# Altium PCB theremania_test_board2.PcbDoc
Units mm, origin at the board's own origin, x right, y up, seen from the top; angles counter-clockwise.
Board outline 88.9 x 67.06 mm, 2 copper layers (Top Layer, Bottom Layer); 64 components, 47 nets, 221 pads, 16 vias.
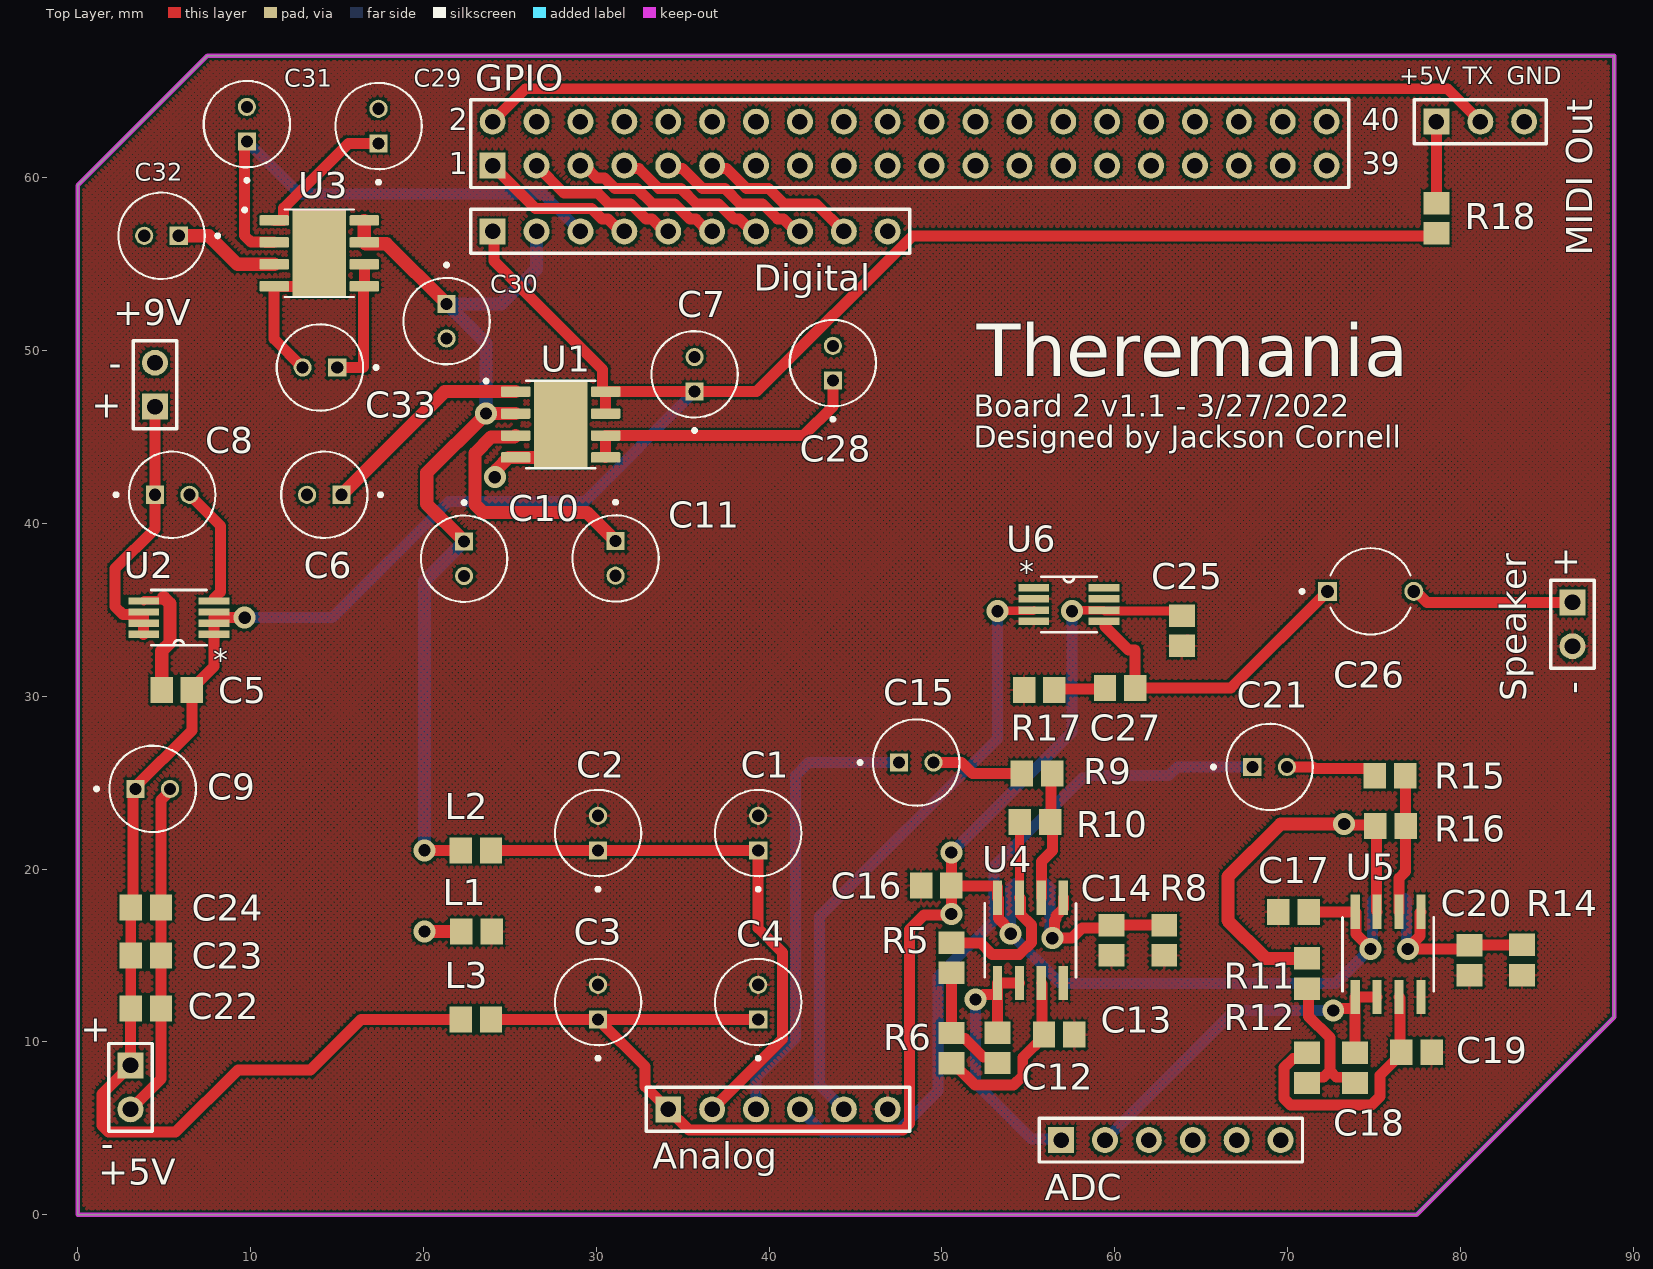
[diagram p0: Top Layer view]
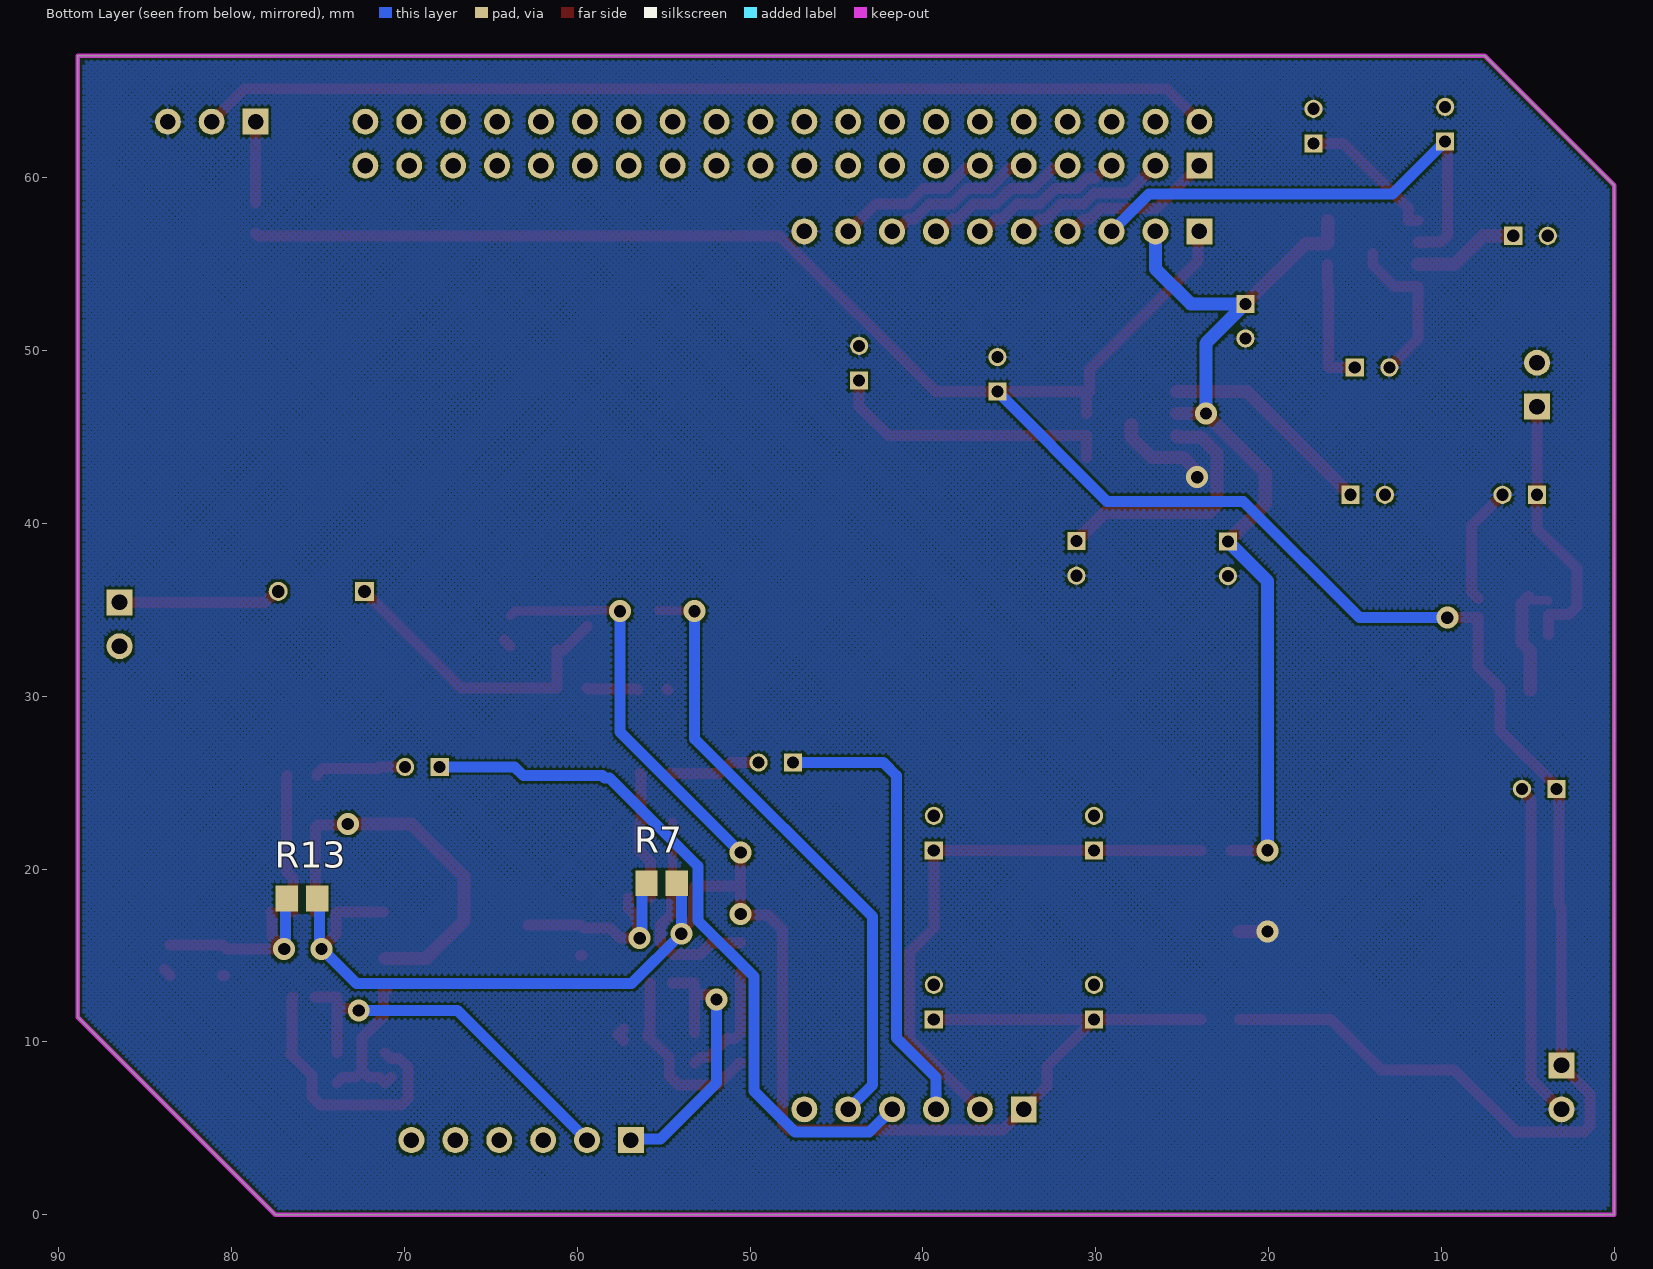
[diagram p1: Bottom Layer view, seen from below]

## Layer stack, top to bottom
Top Solder: solder mask 0.0102, Solder Resist, Dk 3.5
Top Layer: signal copper 0.0356
Dielectric 1: dielectric 0.32, FR-4, Dk 4.8
Bottom Layer: signal copper 0.0356
Bottom Solder: solder mask 0.0102, Solder Resist, Dk 3.5

## Board outline
0,0 0,59.563 7.493,67.056 88.9,67.056 88.9,11.43 77.47,0

## Design rules (kind name [scope] priority, off if disabled: settings)
BoardOutlineClearance [All] p1: gap=0.2 ignorepadtopadclearanceinfootprint=FALSE
Clearance [All] p1: gap=0.127 ignorepadtopadclearanceinfootprint=FALSE except(0.25: Arc-Hole Track-Hole SMDPad-Hole THPad-Hole Via-Hole Fill-Hole Poly-Hole Region-Hole)
ComponentClearance [All] p1: gap=0.127 collisioncheckmode=3 verticalgap=0.127 showdistances=TRUE
DiffPairsRouting [All] p1: maxlimit=0.254 minlimit=0.127 mostfreqgap=0.127 toplayer_minwidth=0.127 toplayer_maxwidth=25.4 toplayer_prefwidth=0.127 bottomlayer_minwidth=0.127 bottomlayer_maxwidth=25.4 bottomlayer_prefwidth=0.127 maxuncoupledlength=0.127
Height [All] p1: minheight=0 maxheight=1816.048 prefheight=1816.048
HoleSize [All] p1: absolutevalues=TRUE maxlimit=6.3 minlimit=0.3 maxpercent=80.000 minpercent=20.000
HoleToHoleClearance [All] p1: gap=0.25 allowstackedmicrovias=TRUE
LayerPairs [All] p1: enforce=FALSE
MinimumSolderMaskSliver [All] p1: minsoldermaskwidth=0
PlaneConnect PlaneConnectPowerPads [InPadClass('PowerPads')] p1: planeconnectstyle=Direct reliefexpansion=0.508 reliefentries=4 reliefconductorwidth=0.254 reliefairgap=0.254
PlaneConnect [All] p2: pad.planeconnectstyle=Relief pad.reliefexpansion=0.3 pad.reliefentries=4 pad.reliefconductorwidth=0.127 pad.reliefairgap=0.127 via.planeconnectstyle=Direct via.reliefexpansion=0.3 via.reliefentries=4 via.reliefconductorwidth=0.127 via.reliefairgap=0.254
PolygonConnect PolygonConnectPowerPads [All vs (InPadClass('PowerPads'))] p1: connectstyle=Direct reliefconductorwidth=0.254 reliefentries=4 polygonreliefangle="90 Angle" airgapwidth=0.254
PolygonConnect [All] p2: thpad.connectstyle=Relief thpad.reliefconductorwidth=0.127 thpad.reliefentries=4 thpad.polygonreliefangle="90 Angle" thpad.airgapwidth=0.127 smdpad.connectstyle=Relief smdpad.reliefconductorwidth=0.127 smdpad.reliefentries=4 smdpad.polygonreliefangle="90 Angle" smdpad.airgapwidth=0.127 via.connectstyle=Direct via.reliefconductorwidth=0.127 via.reliefentries=4 via.polygonreliefangle="90 Angle" via.airgapwidth=0.254
RoutingVias [All] p1: holewidth=0.3 width=0.6 viastyle="Through Hole" minholewidth=0.3 minwidth=0.6 maxholewidth=0.6 maxwidth=1.27
SilkToSilkClearance [All] p1: silktosilkclearance=0
SilkToSolderMaskClearance [IsPad] p1 off: minsilkscreentomaskgap=0.254 clearancetoexposedcopper=TRUE
SolderMaskExpansion [All] p1: expansion=0.102
Width [All] p1: maxlimit=25.4 minlimit=0.127 preferedwidth=0.127 minimp=50.000000 maximp=50.000000 favimp=50.000000
20 further rules are at their usual default settings.

## Classes and differential pairs
component class speaker: C25 C26 C27 R17 Speaker U6
component class preamp: C12 C13 C14 C15 C16 C17 C18 C19 C20 C21 R5 R6 R7 R8 R9 R10 R11 R12 R13 R14 R15 R16 U4 U5
component class power: +9V C1 C2 C3 C4 C5 C6 C7 C8 C9 C10 C11 C28 C29 C30 C31 C32 C33 L1 L2 L3 U1 U2 U3
component class midi: "MIDI Out" R18
component class fpga: +5V ADC C22 C23 C24 GPIO
component class connectors: Analog Digital

## Components (designator, comment, footprint, x,y, rotation, side; value= is the part's Value field where it differs from the comment)
+5V "Header 2" HDR1X2 3.048,8.636 r270 top
+9V "Header 2" HDR1X2 4.465,46.756 r90 top
ADC "Header 6" HDR1X6 56.896,4.318 r0 top
Analog "Header 6" HDR1X6 34.163,6.096 r0 top
C1 "10uF" CAPPRD200W50D500H1250 39.37,22.082 r90 top
C2 "10uF" CAPPRD200W50D500H1250 30.099,22.082 r90 top
C3 "10uF" CAPPRD200W50D500H1250 30.099,12.303 r90 top
C4 "10uF" CAPPRD200W50D500H1250 39.37,12.303 r90 top
C5 "Cap" CAPC0805 5.729,30.353 r0 top value=100pF
C6 "10uF" CAPPRD200W50D500H1250 14.264,41.656 r180 top
C7 "10uF" CAPPRD200W50D500H1250 35.687,48.625 r90 top
C8 "1uF" CAPPRD200W50D500H1250 5.461,41.656 r0 top
C9 "1uF" CAPPRD200W50D500H1250 4.334,24.638 r0 top
C10 "10uF" CAPPRD200W50D500H1250 22.352,37.957 r270 top
C11 "1uF" CAPPRD200W50D500H1250 31.115,37.973 r270 top
C12 "Cap" CAPC0805 53.213,9.652 r90 top value=33nF
C13 "Cap" CAPC0805 56.783,10.414 r180 top value=3.3nF
C14 "Cap" CAPC0805 59.817,15.875 r90 top value=0.1uF
C15 "10uF" CAPPRD200W50D500H1250 48.514,26.162 r0 top
C16 "Cap" CAPC0805 49.671,19.05 r0 top value=0.1uF
C17 "Cap" CAPC0805 70.344,17.526 r0 top value=0.1uF
C18 "Cap" CAPC0805 73.914,8.495 r90 top value=33nF
C19 "Cap" CAPC0805 77.456,9.398 r180 top value=3.3nF
C20 "Cap" CAPC0805 80.518,14.718 r90 top value=0.1uF
C21 "10uF" CAPPRD200W50D500H1250 68.961,25.908 r0 top
C22 "Cap" CAPC0805 3.937,11.938 r180 top value=0.1uF
C23 "Cap" CAPC0805 3.937,14.986 r180 top value=0.1uF
C24 "Cap" CAPC0805 3.937,17.78 r180 top value=0.1uF
C25 "Cap" CAPC0805 63.881,33.782 r90 top value=0.1uF
C26 "270uF" CAPPRD500W50D500H1100 74.803,36.068 r0 top
C27 "Cap" CAPC0805 60.311,30.48 r180 top value=0.047uF
C28 "1uF" CAPPRD200W50D500H1250 43.688,49.276 r90 top
C29 "10uF" CAPPRD200W50D500H1250 17.399,62.992 r90 top
C30 "10uF" CAPPRD200W50D500H1250 21.336,51.705 r270 top
C31 "10uF" CAPPRD200W50D500H1250 9.779,63.103 r90 top
C32 "1uF" CAPPRD200W50D500H1250 4.842,56.642 r180 top
C33 "1uF" CAPPRD200W50D500H1250 14.01,49.022 r180 top
Digital "Header 10" HDR1X10 24.003,56.896 r0 top
GPIO "Header 20X2" HDR2X20 24.003,60.706 r0 top
L1 "FB" RES0805 23.067,16.383 r180 top
L2 "FB" RES0805 23.034,21.082 r0 top
L3 "FB" RES0805 23.034,11.303 r0 top
"MIDI Out" "Header 3" HDR1X3 78.613,63.246 r0 top
R5 "Res3" RES0805 50.546,14.873 r270 top value=1K
R6 "Res3" RES0805 50.546,9.638 r270 top value=39K
R7 "Res3" RES0805 55.118,19.177 r0 bottom value=1K
R8 "Res3" RES0805 62.865,15.875 r90 top value=1K
R9 "Res3" RES0805 55.499,25.527 r0 top value=10K
R10 "Res3" RES0805 55.386,22.733 r180 top value=10K
R11 "Res3" RES0805 71.12,13.956 r270 top value=1K
R12 "Res3" RES0805 71.12,8.495 r90 top value=39K
R13 "Res3" RES0805 75.932,18.288 r0 bottom value=1K
R14 "Res3" RES0805 83.566,14.732 r90 top value=1K
R15 "Res3" RES0805 75.932,25.4 r0 top value=10K
R16 "Res3" RES0805 75.96,22.479 r180 top value=10K
R17 "Res" RES0805 55.626,30.353 r180 top value=10
R18 "Res" RES0805 78.613,57.658 r90 top value=220
Speaker "Header 2" HDR1X2 86.487,35.433 r270 top
U1 "LDO" SOIC127P600X175-9N 27.94,45.72 r0 top
U2 "ADP3335ARMZ-5" SOP65P490X110-8N 5.842,34.544 r180 top
U3 "LDO" SOIC127P600X175-9N 13.97,55.626 r0 top
U4 "LT1632CS8PBF" SO-8_S 55.118,15.875 r90 top
U5 "LT1632CS8PBF" SO-8_S 75.819,15.062 r90 top
U6 "LM386M-1/NOPB" SOP65P490X110-8N 57.347,35.306 r0 top

## Footprints (in the part's own frame and the unit in brackets; to place one, negate y for a bottom-side part, rotate by r counter-clockwise, add the part's x,y. Pads: shape width x height; smd on the part's side, far side on the other; paste and mask are expansions set on the pad)
CAPC0805 [mm] "Chip Capacitor, 2-Leads, Body 2.01x1.25mm, IPC Medium Density"
  rect 1.3x1.5 smd: 1(-0.875,0) 2(0.875,0)
  body extent -1.1,-0.72 1.11,0.72, height 1.8
CAPPRD200W50D500H1250 [mm]
  round 1.05 hole 0.7: N(1,0)
  rect 1.05x1.05 hole 0.7: P(-1,0)
  silkscreen extent -3.35,-2.5 2.5,2.5
CAPPRD500W50D500H1100 [mm]
  round 1.1 hole 0.75: N(2.5,0)
  rect 1.1x1.1 hole 0.75: P(-2.5,0)
  silkscreen extent -4.06,-2.5 2.32,2.5, body extent -2.75,-2.5 2.75,2.5, height 11
HDR1X2 [mm] "Connector; Header; 2 Position"
  rect 1.5x1.5 hole 0.9: 1(0,0)
  round 1.5 hole 0.9: 2(2.54,0)
  silkscreen extent -1.27,-1.27 3.81,1.27
HDR1X3 [mm] "Connector; Header; 3 Position"
  rect 1.5x1.5 hole 0.9: 1(0,0)
  round 1.5 hole 0.9: 2(2.54,0) 3(5.08,0)
  silkscreen extent -1.27,-1.27 6.35,1.27
HDR1X6 [mm] "Connector; Header; 6 Position"
  rect 1.5x1.5 hole 0.9: 1(0,0)
  round 1.5 hole 0.9: 2(2.54,0) 3(5.08,0) 4(7.62,0) 5(10.16,0) 6(12.7,0)
  silkscreen extent -1.27,-1.27 13.97,1.27
HDR1X10 [mm] "Connector; Header; 10 Position"
  rect 1.5x1.5 hole 0.9: 1(0,0)
  round 1.5 hole 0.9: 2(2.54,0) 3(5.08,0) 4(7.62,0) 5(10.16,0) 6(12.7,0) 7(15.24,0) 8(17.78,0) 9(20.32,0) 10(22.86,0)
  silkscreen extent -1.27,-1.27 24.13,1.27
HDR2X20 [mm] "Connector; Header; 20x2 Position"
  rect 1.5x1.5 hole 0.9: 1(0,0)
  round 1.5 hole 0.9: 2(0,2.54) 3(2.54,0) 4(2.54,2.54) 5(5.08,0) 6(5.08,2.54) 7(7.62,0) 8(7.62,2.54) 9(10.16,0) 10(10.16,2.54) 11(12.7,0) 12(12.7,2.54) 13(15.24,0) 14(15.24,2.54) 15(17.78,0) 16(17.78,2.54) 17(20.32,0) 18(20.32,2.54) 19(22.86,0) 20(22.86,2.54) 21(25.4,0) 22(25.4,2.54) 23(27.94,0) 24(27.94,2.54) 25(30.48,0) 26(30.48,2.54) 27(33.02,0) 28(33.02,2.54) 29(35.56,0) 30(35.56,2.54) 31(38.1,0) 32(38.1,2.54) 33(40.64,0) 34(40.64,2.54) 35(43.18,0) 36(43.18,2.54) 37(45.72,0) 38(45.72,2.54) 39(48.26,0) 40(48.26,2.54)
  silkscreen extent -1.27,-1.27 49.53,3.81
RES0805 [mm] "Chip Resistor, 2-Leads, Body 2.01x1.25mm, IPC Medium Density"
  rect 1.3x1.5 smd: 1(-0.875,0) 2(0.875,0)
  body extent -1.1,-0.72 1.11,0.72, height 1.8
SO-8_S [mil]
  rect 78x21 smd: 1(-97,75) 2(-97,25) 3(-97,-25) 4(-97,-75) 5(97,-75) 6(97,-25) 7(97,25) 8(97,75)
  silkscreen extent -84,-104 84,104
SOIC127P600X175-9N [mm]
  rrect25% 1.71x0.61 smd: 1(-2.605,1.905) 2(-2.605,0.635) 3(-2.605,-0.635) 4(-2.605,-1.905) 5(2.605,-1.905) 6(2.605,-0.635) 7(2.605,0.635) 8(2.605,1.905)
  rect 3.1x5 smd paste-3: 9(0,0)
  silkscreen extent -4.41,-2.53 2,2.61
SOP65P490X110-8N [mil]
  rect 70x17 smd: 1(-80,38) 2(-80,13) 3(-80,-13) 4(-80,-38) 5(80,-38) 6(80,-13) 7(80,13) 8(80,38)
  silkscreen extent -63,-63 63,63

## Part data
+5V +9V Speaker: "Header, 2-Pin", LatestRevisionDate=17-Jul-2002, LatestRevisionNote="Re-released for DXP Platform.", Publisher="Altium Limited"
ADC Analog: "Header, 6-Pin", LatestRevisionDate=17-Jul-2002, LatestRevisionNote="Re-released for DXP Platform.", Publisher="Altium Limited"
C1 C2 C3 C4 C6 C7 C8 C9 C10 C11 C15 C21 C26 C28 C29 C30 C31 C32 C33: library part EEUFS0J221B, "Aluminum Electrolytic Capacitors, 220uF, 6.3V, -40 to 105C", Package="RADIAL-2 Panasonic", Availability="In Stock", Check_prices=https://www.snapeda.com/parts/EEUFS0J221B/Panasonic/view-part/5796863/?ref=eda, MF=Panasonic, MP=EEUFS0J221B, Price=None, Purchase-URL=https://pricing.snapeda.com/search/part/EEUFS0J221B/?ref=eda, SnapEDA_Link=https://www.snapeda.com/parts/EEUFS0J221B/Panasonic/view-part/5796863/?ref=snap
C5 C25 C27: Supplier Part Number 1=1276-1000-1-ND, Supplier 1=Digi-Key
C12 C13 C14 C16 C17 C18 C19 C20 C22 C23 C24: "Capacitor", LatestRevisionDate=17-Jul-2002, LatestRevisionNote="Re-released for DXP Platform.", PackageDescription="Radial Cap, Thru-Hole; 2 Leads; 0.3 in Pin Spacing", PackageReference=RAD-0.3, Published=8-Jun-2000, Publisher="Altium Limited"
Digital: "Header, 10-Pin", LatestRevisionDate=17-Jul-2002, LatestRevisionNote="Re-released for DXP Platform.", Publisher="Altium Limited"
GPIO: "Header, 20-Pin, Dual row", LatestRevisionDate=17-Jul-2002, LatestRevisionNote="Re-released for DXP Platform.", Publisher="Altium Limited"
L1 L2 L3: library part Inductor, "Inductor", Code_IEC=1005, Code_JEITA=0402, LatestRevisionDate=29-May-2009, LatestRevisionNote="IPC-7351 Footprint Added.", PackageDescription="Chip Inductor", PackageReference=0402-A, Published=8-Jun-2000, Publisher="Altium Limited"
"MIDI Out": "Header, 3-Pin", LatestRevisionDate=17-Jul-2002, LatestRevisionNote="Re-released for DXP Platform.", Publisher="Altium Limited"
R5 R6 R7 R8 R9 R10 R11 R12 R13 R14 R15 R16: "Resistor", LatestRevisionDate=29-May-2009, LatestRevisionNote="IPC-7351 Footprint Added.", PackageDescription="Chip Resistor", PackageReference=J1-0603, Published=8-Jun-2000, Publisher="Altium Limited"
R17 R18: Supplier Part Number 1=RMCF0603JT10K0CT-ND, Supplier 1=Digi-Key
U1 U3: library part ADM7154
U2: library part ADP3335ARMZ-3.3, "Linear Voltage Regulator IC 1 Output 500mA 8-MSOP", Package="MSOP-8 Analog Devices", Availability=Unavailable, MF="Analog Devices", MP=ADP3335ARMZ-3.3, Price=None, SnapEDA_Link=https://www.snapeda.com/parts/ADP3335ARMZ-3.3/Analog%20Devices/view-part/674568/?ref=snap
U4 U5: "45MHz, 45V/ms, Dual/Quad Rail-to-Rail Input and Output  Precision Op Amps", Package=None, Availability=Unavailable, MP=LT1632CS8PBF, Price=None
U6: "Wide Input Voltage Low Power Audio Amplifier with Internal Gain", Package="SOIC-8 Texas Instruments", Availability=Unavailable, MF="Texas Instruments", MP=LM386M-1, Price=None, SnapEDA_Link=https://www.snapeda.com/parts/LM386M-1/Texas%20Instruments/view-part/2583261/?ref=snap

## Via types
v1: diameter 1.27, hole 0.711, Top Layer to Bottom Layer, 16 vias

## Nets (pads, with @x,y where several pads share a name; then routed paths per layer and width w, separated by ;. In a path a pad name is that pad's centre, name@x,y a point inside that pad or via, vN(x,y) a via of type N, cw(c..) or ccw(c..) an arc to the next point about the centre after c; other vN are vias at no path point)
1.2VD: C31.P Digital.3 U3.2 | length 29.4
  Top Layer w0.635: C31.P 9.652,61.976 9.652,56.645 10.024,56.273 11.353,56.273 U3.2 U3.2@10.84,56.261
  Bottom Layer w0.635: C31.P 12.827,59.055 26.924,59.055 Digital.3
3.3VA: Analog.2 C1.P C2.P L2.2 | length 32.9
  Top Layer w0.635: L2.2 C2.P C1.P 39.37,16.573 40.767,15.176 40.767,10.16 Analog.2
  Bottom Layer w0.635: Analog.2@36.576,6.223 Analog.2
3.3VD: C10.P C30.P Digital.2 L2.1 U1.2 U3.7 U3.8 | length 55.3
  Top Layer w0.635: v1(20.066,21.082) L2.1
  Top Layer w0.762: U3.8 U3.7 16.651,56.185 17.856,56.185 C30.P ; C10.P 20.193,41.116 20.193,42.926 v1(23.622,46.355) U1.2
  Bottom Layer w0.762: v1(20.066,21.082) 20.066,36.671 C10.P ; v1(23.622,46.355) 23.622,50.419 C30.P 24.511,52.705 26.543,54.737 Digital.2
5VA: Analog.1 C3.P C4.P C16.2 C17.2 C25.2 L3.2 R7.1 R13.1 U4.8 U5.8 U6.6 | length 118.6
  Top Layer w0.508: v1(57.531,34.925) 57.582,34.976 U6.6 59.417,34.938 63.6,34.938 C25.2
  Top Layer w0.635: L3.2@23.953,11.259 L3.2 C3.P ; C4.P C3.P ; v1(50.546,20.955) C16.2 ; v1(53.975,16.256) 53.975,16.428 53.264,17.139 53.264,18.288 U4.8 53.213,18.961 53.162,19.012 50.584,19.012 C16.2 ; C17.2 U5.8 73.965,17.475 73.965,16.25 74.803,15.412 v1(74.803,15.367) ; C3.P 32.832,8.57 32.832,7.427 Analog.1 35.358,4.901 47.761,4.901 48.133,5.273 48.133,16.51 48.959,17.336 50.483,17.336 v1(50.546,17.399) C16.2
  Bottom Layer w0.635: Analog.1@33.731,6.529 Analog.1 ; v1@50.425,17.277 v1(50.546,17.399) ; v1(50.546,20.955) 57.531,27.94 v1(57.531,34.925) ; R7.1 53.975,18.909 v1(53.975,16.256) 56.851,13.38 72.771,13.38 74.631,15.24 74.676,15.24 v1(74.803,15.367) 74.925,15.489 74.925,18.156 R13.1
5VD: +5V.1 C5.2 C7.P C9.P C22.2 C23.2 C24.2 Digital.1 L3.1 R18.1 U1.7 U1.8 U2.1 U2.2 U2.3 | length 154
  Top Layer w0.635: v1(9.652,34.544) 7.874,34.544 U2.2 U2.1 7.874,31.723 6.604,30.453 C5.2 6.604,28.027 3.202,24.625 3.202,17.92 C24.2 C23.2 C22.2 3.055,11.931 3.055,8.643 +5V.1 1.397,6.985 1.397,5.146 1.769,4.774 5.664,4.774 9.271,8.382 13.462,8.382 16.383,11.303 L3.1@21.684,11.303 ; Digital.1 24.079,56.82 24.079,55.193 30.365,48.907 30.365,47.637 30.377,47.625 U1.8 ; U1.7 U1.8 ; R18.1 78.472,56.642 48.298,56.642 39.281,47.625 C7.P U1.8
  Bottom Layer w0.635: +5V.1 +5V.1@3.302,8.382 ; v1(9.652,34.544) 14.732,34.544 21.463,41.275 29.337,41.275 C7.P
9V: +9V.1 C8.P U2.6 U2.7 U2.8 | length 15.6
  Top Layer w0.635: U2.8 U2.7 3.81,34.671 3.759,34.722 2.616,34.722 2.159,35.179 2.159,37.381 4.461,39.683 C8.P 4.463,41.658 4.463,46.524 4.348,46.639 +9V.1
ADC_CH0: ADC.1 C12.2 U4.1 U4.2 | length 16.7
  Top Layer w0.635: v1(51.943,12.446) 52.115,12.446 52.407,12.738 53.162,12.738 U4.1@53.213,12.789 ; C12.2 U4.1@53.213,12.789 ; U4.2 U4.1 U4.1@53.213,12.789
  Bottom Layer w0.635: v1(51.943,12.446) 51.943,7.62 55.193,4.37 56.844,4.37 ADC.1
ADC_CH1: ADC.2 C18.2 U5.1 U5.2 | length 22.1
  Top Layer w0.635: v1(72.644,11.811) 72.758,11.925 73.863,11.925 U5.1@73.914,11.976 ; C18.2 U5.1@73.914,11.976 ; U5.2 U5.1 U5.1@73.914,11.976
  Bottom Layer w0.635: ADC.2 66.929,11.811 v1(72.644,11.811)
ADC_CH2: ADC.3
ADC_CH3: ADC.4
ADC_CH4: ADC.5
ADC_CH5: ADC.6
AGND: Analog.6 C1.N C2.N C3.N C4.N C13.1 C14.1 C16.1 C17.1 C19.1 C20.1 C25.1 L1.1 R8.1 R14.1 R17.2 Speaker.2 U4.4 U5.4 U6.2 U6.4 | length 2.2
  Top Layer w0.635: R17.2 R17.2@54.814,30.416 ; C13.1@57.326,10.081 C13.1 C13.1@57.326,10.747 ; C14.1@59.717,15 C14.1 ; C25.1 C25.1@64.214,33.24 ; C20.1@80.418,13.843 C20.1 C20.1@80.525,13.85 ; R14.1@83.559,13.85 R14.1 R14.1@83.899,14.19
CS: Digital.7 GPIO.7 | length 9.2
  Top Layer w0.635: GPIO.7 31.789,60.54 32.46,60.54 33.616,59.384 34.898,59.384 35.787,58.495 37.07,58.495 37.959,57.606 38.298,57.606 39.009,56.896 Digital.7
GND: "MIDI Out.3" +5V.2 +9V.2 C6.N C7.N C8.N C9.N C10.N C11.N C22.1 C23.1 C24.1 C28.N C29.N C30.N C31.N C32.N C33.N Digital.10 L1.2 U1.4 U1.9 U2.4 U3.4 U3.9 | length 43.3
  Top Layer w0.635: +5V.2 4.812,7.86 C22.1 C23.1 C24.1 4.812,24.004 5.334,24.526 C9.N ; +9V.2 +9V.2@4.699,49.296 ; C8.N 8.255,39.862 8.255,36.043 U2.4@7.874,35.662 ; C33.N 11.365,50.667 U3.4 12.738,53.721 13.97,54.953 U3.9
  Top Layer w0.762: v1(20.066,16.383) L1.2@21.717,16.383 ; v1(24.13,42.672) 24.227,42.769 24.227,43.105 24.937,43.815 U1.4 26.771,43.815 27.94,44.984 U1.9 ; Digital.10 Digital.10@46.99,57.023
GO: Digital.8 GPIO.9 | length 9.2
  Top Layer w0.635: GPIO.9 34.329,60.54 35,60.54 36.156,59.384 37.438,59.384 38.327,58.495 39.61,58.495 40.499,57.606 40.838,57.606 41.549,56.896 Digital.8
LINE_OUT: Analog.5 U6.3 | length 35.8
  Top Layer w0.508: v1(53.213,34.925) 53.238,34.95 55.29,34.95 U6.3
  Bottom Layer w0.635: Analog.5 42.926,7.493 42.926,17.25 53.213,27.537 v1(53.213,34.925)
MIC_IN: Analog.4 C21.P | length 41.2
  Bottom Layer w0.635: Analog.4 43.105,4.774 47.41,4.774 49.784,7.148 49.784,13.771 53.022,17.009 53.022,20.164 58.131,25.273 58.42,25.273 58.547,25.4 63.119,25.4 63.627,25.908 C21.P
MISO: Digital.6 GPIO.5 | length 9.2
  Top Layer w0.635: GPIO.5 29.317,60.706 30.028,59.996 30.465,59.996 31.076,59.384 32.358,59.384 33.247,58.495 34.53,58.495 35.419,57.606 35.758,57.606 36.469,56.896 Digital.6
MOSI: Digital.5 GPIO.3 | length 9.2
  Top Layer w0.635: GPIO.3 28.143,59.107 30.096,59.107 30.707,58.495 31.99,58.495 32.879,57.606 33.218,57.606 33.929,56.896 Digital.5
NetC5_1: C5.1 U2.5 | length 7
  Top Layer w0.381: U2.5 U2.5@3.81,35.535
  Top Layer w0.508: U2.5 3.848,35.547 4.813,35.547 4.977,35.711
  Top Layer w0.762: C5.1 4.854,32.62 5.334,33.1 5.334,35.353 4.977,35.711
NetC6_P: C6.P U1.1 | length 12.5
  Top Layer w0.762: C6.P 21.233,47.625 U1.1
NetC11_P: C11.P U1.3 | length 14.8
  Top Layer w0.762: U1.3 25.259,45.009 23.927,45.009 22.987,44.069 22.987,41.086 23.433,40.64 29.448,40.64 C11.P
NetC12_1: C12.1 R5.2 R6.1 | length 6.9
  Top Layer w0.635: R5.2 R6.1 50.879,10.18 51.337,10.18 52.408,9.11 52.881,9.11 C12.1
NetC13_2: C13.2 R6.2 U4.3 | length 10.8
  Top Layer w0.635: R6.2 50.646,8.763 51.916,7.493 54.137,7.493 54.677,8.033 54.677,9.083 55.908,10.314 C13.2 55.804,10.518 55.804,13.36 U4.3
NetC14_2: C14.2 R7.2 R8.2 U4.5 | length 12.7
  Top Layer w0.635: U4.5 57.023,17.716 56.591,17.285 56.591,17.111 56.51,17.03 56.51,16.124 v1(56.388,16.002) 57.531,16.002 58.115,16.585 59.653,16.585 C14.2 R8.2
  Bottom Layer w0.635: R7.2 56.267,18.904 56.267,16.124 v1(56.388,16.002)
NetC15_N: C15.N R9.1 | length 5.4
  Top Layer w0.635: C15.N 51.14,26.162 51.775,25.527 R9.1
NetC18_1: C18.1 R11.2 R12.1 | length 9.3
  Top Layer w0.635: R12.1@70.788,7.953 R12.1 71.453,7.953 72.082,7.953 72.451,8.321 ; R11.2@71.02,12.981 R11.2 71.22,12.981 71.22,11.478 72.451,10.248 72.451,8.321 ; C18.1 73.582,7.953 72.82,7.953 72.451,8.321
NetC19_2: C19.2 R12.2 U5.3 | length 15.7
  Top Layer w0.635: R12.2 70.788,9.037 70.329,9.037 69.799,8.507 69.799,6.733 70.182,6.35 74.852,6.35 75.35,6.848 75.35,8.067 76.581,9.298 76.505,9.374 76.505,12.548 U5.3
NetC20_2: C20.2 R13.2 R14.2 U5.5 | length 12.2
  Top Layer w0.635: U5.5 77.673,17.475 77.673,16.123 76.962,15.412 v1(76.962,15.367) 77.078,15.367 77.084,15.362 80.287,15.362 C20.2 80.525,15.6 83.559,15.6 R14.2
  Bottom Layer w0.635: R13.2 76.885,18.21 76.885,15.445 v1(76.962,15.367)
NetC21_N: C21.N R15.1 | length 5.4
  Top Layer w0.635: C21.N 71.461,25.908 71.55,25.819 74.725,25.819 75.057,25.487 R15.1
NetC26_N: C26.N Speaker.1 | length 9.4
  Top Layer w0.635: C26.N 77.429,36.068 78.064,35.433 Speaker.1
NetC26_P: C26.P C27.1 U6.5 | length 17.9
  Top Layer w0.635: 59.436,34.036 60.79,32.682 61.186,32.682 C27.1 66.715,30.48 C26.P
NetC27_2: C27.2 R17.1 | length 3
  Top Layer w0.635: R17.1 56.565,30.416 59.373,30.416 C27.2
NetC28_P: C28.P U1.5 U1.6 | length 16.6
  Top Layer w0.635: U1.5 U1.6 41.997,45.085 43.688,46.776 C28.P
NetC29_P: C29.P U3.1 | length 8.3
  Top Layer w0.635: U3.1 11.89,57.531 11.903,57.543 11.903,58.237 15.657,61.992 C29.P
NetC32_P: C32.P U3.3 | length 6.2
  Top Layer w0.762: C32.P 7.579,56.642 9.23,54.991 U3.3
NetC33_P: C33.P U3.5 U3.6 | length 7.5
  Top Layer w0.635: C33.P 16.51,49.022 16.543,49.055 16.543,53.709 16.555,53.721 U3.5 U3.6
"NetMIDI Out_1": "MIDI Out.1" R18.2 | length 4.7
  Top Layer w0.635: R18.2 78.613,63.246
NetR5_1: R5.1 R10.2 U4.7 | length 12.5
  Top Layer w0.508: U4.7 54.496,18.351 54.496,22.718 R10.2
  Top Layer w0.635: R5.1 50.583,15.711 52.249,15.711 52.91,15.05 54.475,15.05 55.182,15.756 55.182,16.756 54.534,17.403 54.534,18.288 U4.7
NetR9_2: R9.2 R10.1 U4.6 | length 7.6
  Top Layer w0.635: U4.6 55.753,20.447 56.388,21.082 56.388,22.606 R10.1 56.318,22.789 56.318,25.471 R9.2
NetR11_1: R11.1 R16.2 U5.7 | length 22.9
  Top Layer w0.635: R11.1@71.071,14.781 R11.1 ; v1(73.279,22.606) 73.343,22.543 75.022,22.543 R16.2 75.135,22.43 75.135,17.575 U5.7
  Top Layer w0.762: R11.1 68.735,14.831 66.548,17.018 66.548,19.558 69.596,22.606 v1(73.279,22.606)
NetR15_2: R15.2 R16.1 U5.6 | length 8
  Top Layer w0.635: U5.6 76.454,19.469 76.835,19.85 R16.1 76.821,22.493 76.821,25.386 R15.2
RST: Digital.9 GPIO.11 | length 9.2
  Top Layer w0.635: GPIO.11 36.869,60.54 37.54,60.54 38.696,59.384 39.978,59.384 40.867,58.495 42.724,58.495 Digital.9
SCLK: Digital.4 GPIO.1 | length 9.2
  Top Layer w0.635: GPIO.1 26.492,58.218 27.774,58.218 29.728,58.218 30.339,57.606 30.678,57.606 31.389,56.896 Digital.4
THEREMIN_OUT: Analog.3 C15.P | length 26.6
  Bottom Layer w0.635: Analog.3 39.243,7.928 41.529,10.214 41.529,25.4 42.291,26.162 C15.P
TX: "MIDI Out.2" GPIO.2 | length 59
  Top Layer w0.635: GPIO.2@24.022,63.246 GPIO.2 25.908,65.151 79.248,65.151 81.153,63.246 81.319,63.08
pads on no net: GPIO.4 GPIO.6 GPIO.8 GPIO.10 GPIO.12 GPIO.13 GPIO.14 GPIO.15 GPIO.16 GPIO.17 GPIO.18 GPIO.19 GPIO.20 GPIO.21 GPIO.22 GPIO.23 GPIO.24 GPIO.25 GPIO.26 GPIO.27 GPIO.28 GPIO.29 GPIO.30 GPIO.31 GPIO.32 GPIO.33 GPIO.34 GPIO.35 GPIO.36 GPIO.37 GPIO.38 GPIO.39 GPIO.40 U6.1 U6.7 U6.8

## Polygon pours and split planes (outlines as drawn)
GND on Bottom Layer "Bottom Layer-GND" (hatched 45Degree grid 0.254 track 0.203, pour order 26): 0,0 0,59.563 7.493,67.056 88.9,67.056 88.9,11.43 77.47,0
AGND on Top Layer "Top Layer-AGND" (hatched 45Degree grid 0.254 track 0.203, pour order 22): 0,0 0,59.563 7.493,67.056 88.9,67.056 88.9,11.43 77.47,0

## Keep-outs
Keep-Out Layer:
  the board outline again, w0.254

## Silkscreen, mask and mechanical layers (free items; w line width, h text height)
Top Overlay:
  text "+5V" at 76.454,65.405 h1.02
  text "TX" at 80.137,65.405 h1.02
  text "GND" at 82.677,65.405 h1.02
  text "-" at 2.54,48.514 h1.52
  text "Theremania" at 52.025,48.508 h3.05
  text "Board 2 v1.1 - 3/27/2022" at 51.845,46.174 h1.27
  text "+" at 2.54,46.101 h1.52
  text "Designed by Jackson Cornell" at 51.845,44.378 h1.27
  text "+" at 86.995,37.084 h1.52
  text "-" at 87.249,30.861 h1.52 r90
  text "+" at 1.9,9.995 h1.52
  text "-" at 2.08,3.35 h1.5

## Text inside footprints (layer, text, board x,y; h text height)
GPIO: Top Overlay "39" at 74.295,60.198 h1.27; Top Overlay "40" at 74.295,62.738 h1.27; Top Overlay "2" at 21.463,62.738 h1.27; Top Overlay "1" at 21.463,60.198 h1.27
U2: Top Overlay "*" at 8.712,33.274 h1.27 r180; Mechanical 13 "*" at 8.712,33.274 h1.27 r180; Mechanical 13 "*" at 8.712,33.274 h1.27 r180
U6: Top Overlay "*" at 54.477,36.576 h1.27